# Altium PCB ROUTER.PcbDoc
Units mil, origin at the board's own origin, x right, y up, seen from the top; angles counter-clockwise.
Board outline 6000 x 4000 mil, 2 copper layers (Top Layer, Bottom Layer); 56 components, 30 nets, 161 pads, 6 vias.
Unrouted connection lines stored in the file: 105.
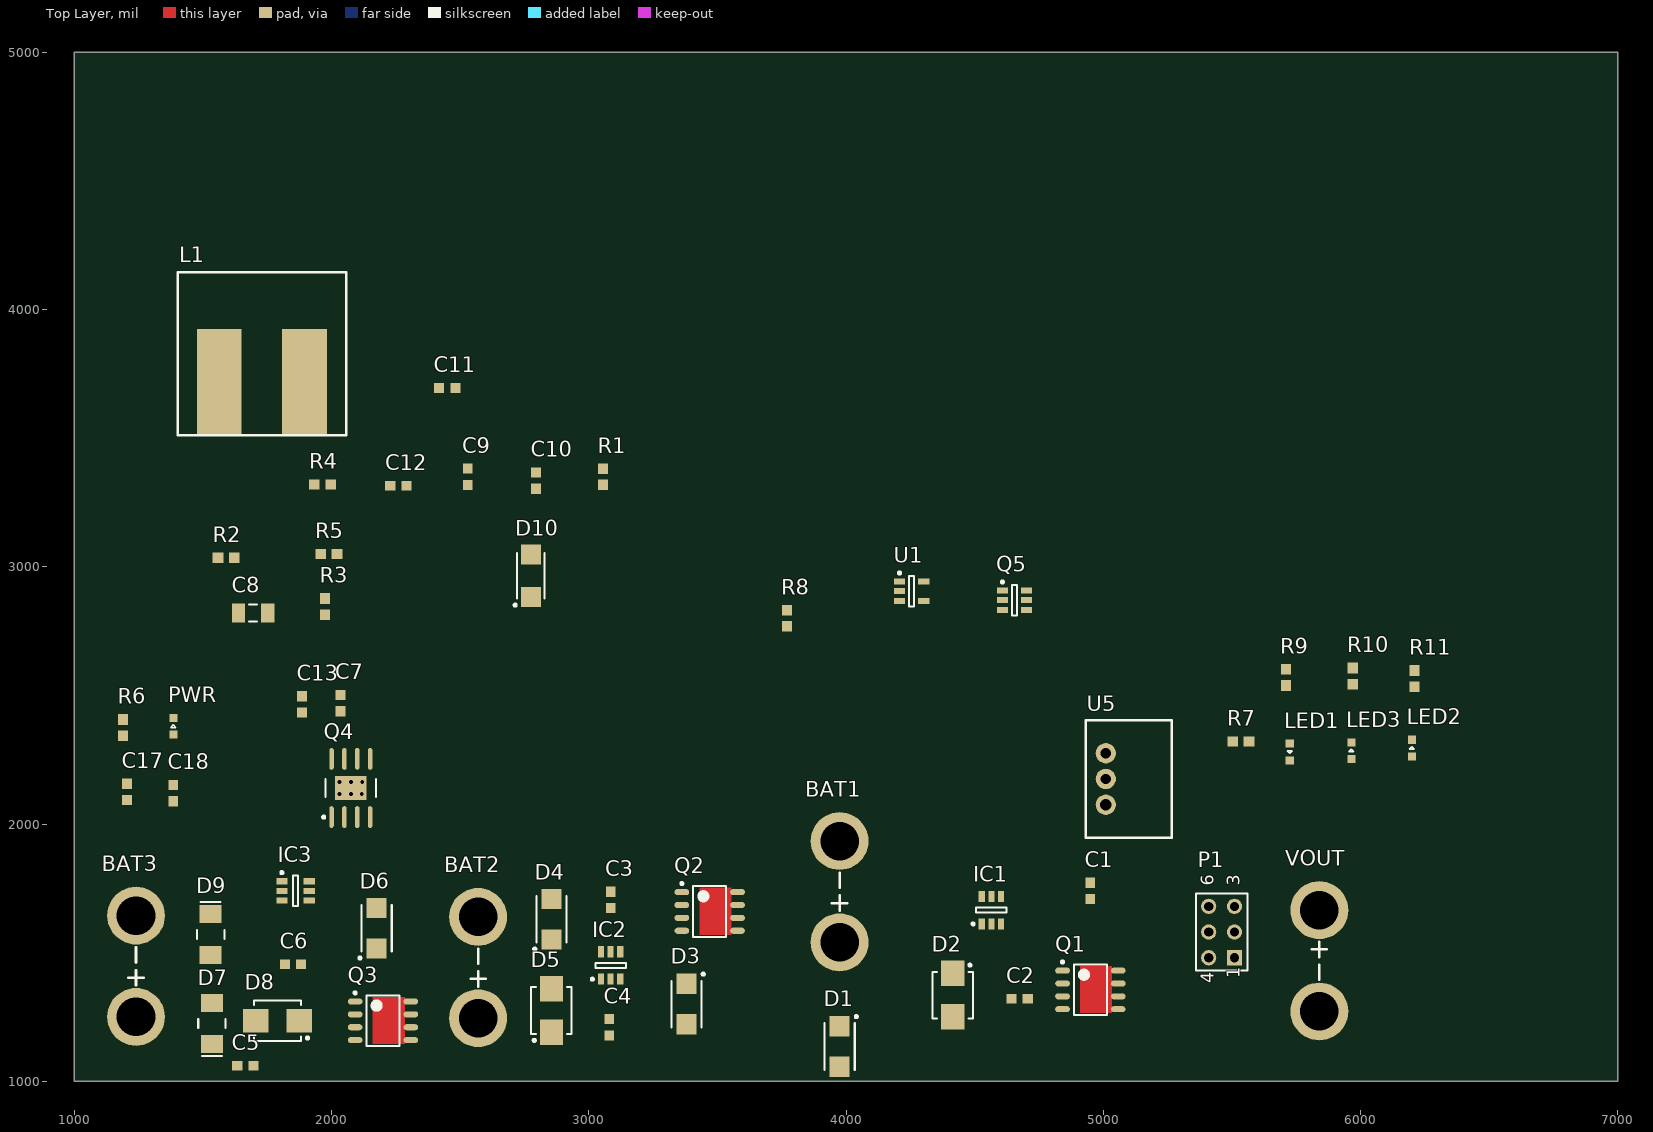
[diagram p0: Top Layer view]
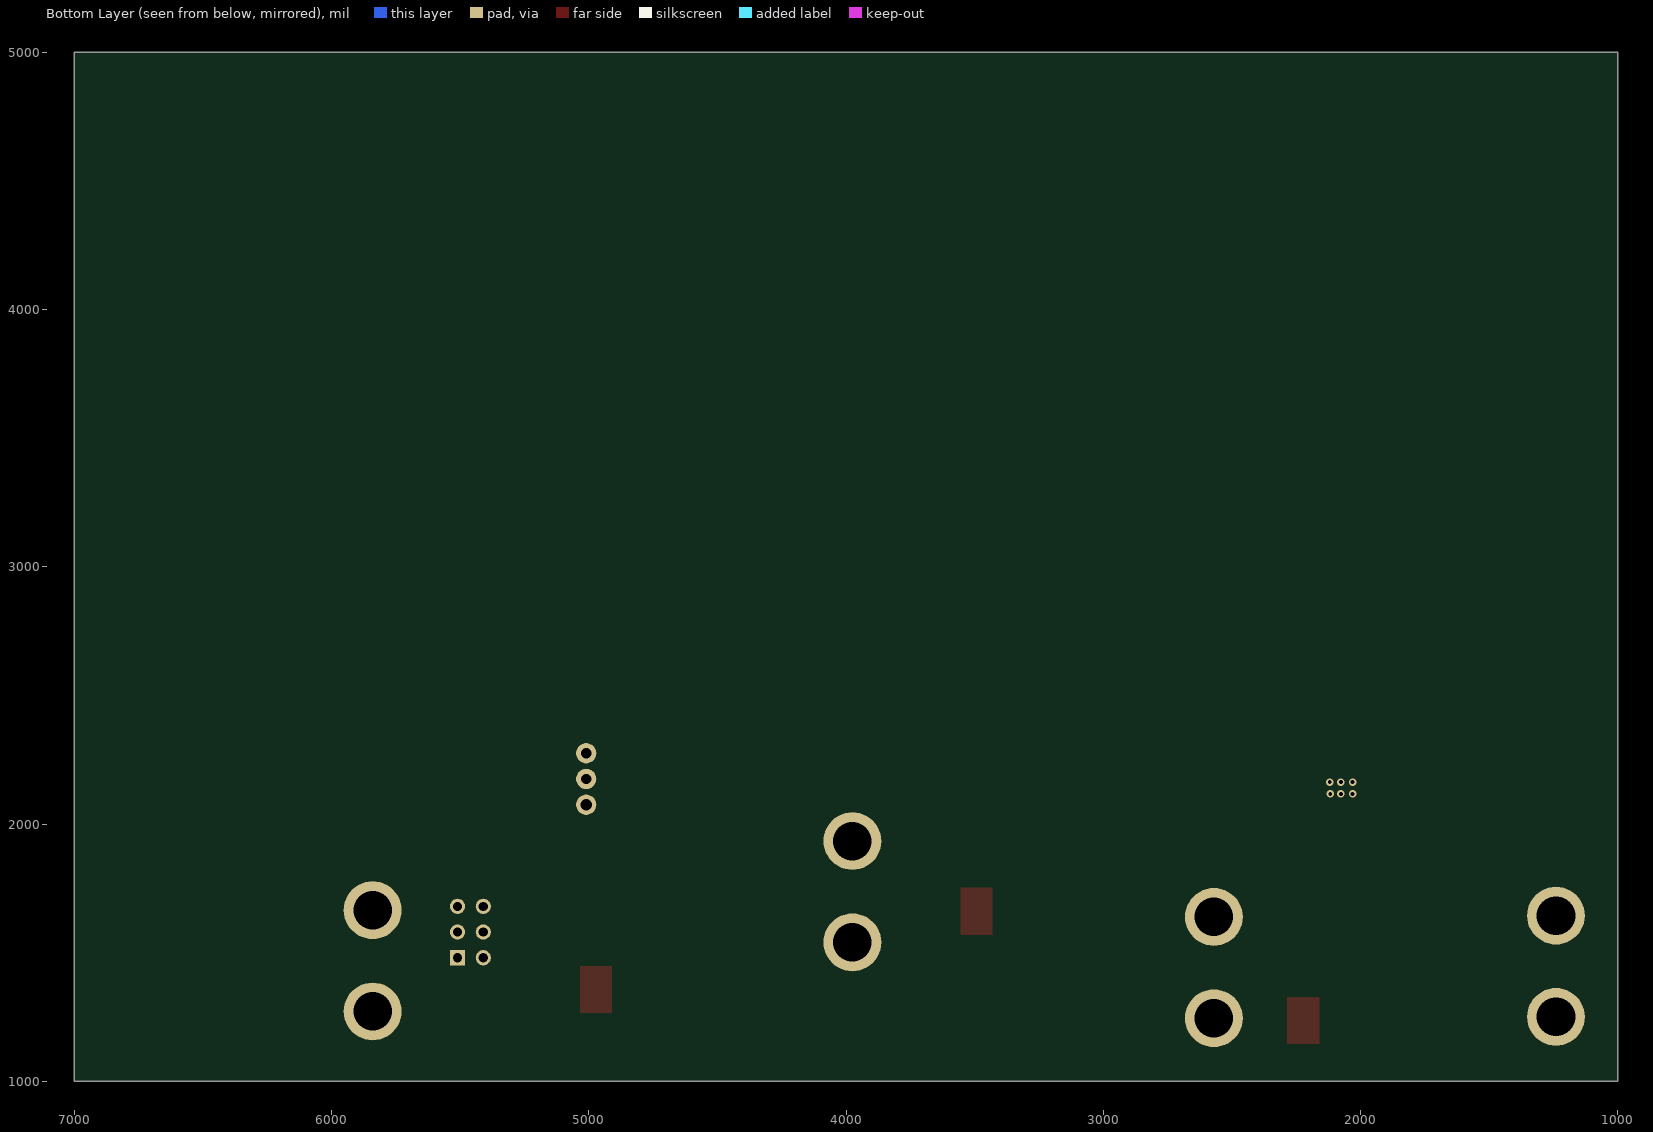
[diagram p1: Bottom Layer view, seen from below]

## Layer stack, top to bottom
Top Layer: signal copper 1.4
Dielectric: dielectric 12.6, FR-4, Dk 4.8
Bottom Layer: signal copper 1.4

## Board outline
1000,1000 7000,1000 7000,5000 1000,5000

## Design rules (kind name [scope] priority, off if disabled: settings)
Clearance [All] p1: gap=10
PolygonConnect [All] p1: connectstyle=Relief reliefconductorwidth=10 reliefentries=4 polygonreliefangle="90 Angle" airgapwidth=10
RoutingVias [All] p1: holewidth=28 width=50 viastyle="Through Hole" minholewidth=28 minwidth=50 maxholewidth=28 maxwidth=50
SolderMaskExpansion [All] p1: expansion=4
Width [All] p1: maxlimit=10 minlimit=10 preferedwidth=10
28 further rules are at their usual default settings.

## Classes and differential pairs
component class Batteries: BAT1 BAT2 BAT3 C1 C2 C3 C4 C5 C6 D1 D2 D3 D4 D5 D6 D7 D8 D9 IC1 IC2 IC3 Q1 Q2 Q3
component class RouterBatteryLED: C17 C18 LED2 LED3 P1 Q5 R8 R9 R10 R11 U1 U5
component class Switching_Regulator: C7 C8 C9 C10 C11 C12 C13 D10 L1 PWR Q4 R1 R2 R3 R4 R5 R6 VOUT

## Components (designator, comment, footprint, x,y, rotation, side; value= is the part's Value field where it differs from the comment)
BAT1 "BATWIRE" BATWIRE12 3975,1540 r90 top
BAT2 "BATWIRE" BATWIRE12 2570,1245 r90 top
BAT3 "BATWIRE" BATWIRE12 1240,1250 r90 top
C1 "Cap" CAPC0603 4950,1740 r90 top
C2 "Cap" CAPC0603 4675,1320 r180 top
C3 "Cap" CAPC0603 3085,1705 r90 top
C4 "Cap" CAPC0603 3080,1210 r90 top
C5 "Cap" CAPC0603 1665,1060 r180 top
C6 "Cap" CAPC0603 1850,1455 r180 top
C7 "Cap" CAPC0603 2035,2470 r270 top
C8 "Cap" CAPC1206 1695,2820 r0 top
C9 "Cap" CAPC0603 2530,3350 r90 top
C10 "Cap" CAPC0603 2795,3335 r90 top
C11 "Cap" CAPC0603 2450,3695 r0 top
C12 "Cap" CAPC0603 2260,3315 r180 top
C13 "Cap" CAPC0603 1885,2465 r90 top
C17 "Cap" CAPC0603 1205,2125 r270 top
C18 "Cap" CAPC0603 1385,2120 r270 top
D1 "SS16T3G" SS16T3G 3975,1135 r270 top
D2 "SMBJ100A-13-F" SMBJ100A-13-F 4415,1335 r270 top
D3 "SS16T3G" SS16T3G 3380,1300 r270 top
D4 "SS16T3G" SS16T3G 2855,1630 r90 top
D5 "SMBJ100A-13-F" SMBJ100A-13-F 2855,1275 r90 top
D6 "SS16T3G" SS16T3G 2175,1595 r90 top
D7 "SS16T3G" SS110-TP 1535,1225 r90 top
D8 "SMBJ100A-13-F" SMBJ100A-13-F 1790,1235 r180 top
D9 "SS16T3G" SS110-TP 1530,1570 r270 top
D10 "DFLS160" RSX501L-20TE25 2775,2965 r90 top
IC1 "LM5050MK-2/NOPB" LM5050MK-2/NOPB 4565,1665 r90 top
IC2 "LM5050MK-2/NOPB" LM5050MK-2/NOPB 3085,1450 r90 top
IC3 "LM5050MK-2/NOPB" LM5050MK-2/NOPB 1860,1740 r0 top
L1 "37392C" 37392C 1895,3720 r90 top
LED1 "LED" LED0603 5725,2280 r270 top
LED2 "LED" LED0603 6200,2295 r90 top
LED3 "LED" LED0603 5965,2285 r90 top
P1 "Header 3X2A" HDR2X3_CEN 5510,1480 r90 top
PWR "LED" LED0603 1385,2380 r90 top
Q1 "TPCA8052-H(TE12LQM" TPCA8052-H(TE12LQM 4950,1355 r0 top
Q2 "TPCA8052-H(TE12LQM" TPCA8052-H(TE12LQM 3470,1660 r0 top
Q3 "TPCA8052-H(TE12LQM" TPCA8052-H(TE12LQM 2200,1235 r0 top
Q4 "TPS54332DDA" TPS54332DDA 2075,2140 r90 top
Q5 "ATTiny5 Atmel Processor" ATTiny5 4655,2870 r0 top
R1 "Res" RES0603 3055,3350 r270 top
R2 "Res" RES0603 1590,3035 r0 top
R3 "Res" RES0603 1975,2845 r90 top
R4 "Res" RES0603 1965,3320 r0 top
R5 "Res" RES0603 1990,3050 r0 top
R6 "Res" RES0603 1190,2375 r270 top
R7 "Res" RES0603 5535,2320 r0 top
R8 "Res" RES0603 3770,2800 r90 top
R9 "Res" RES0603 5710,2570 r90 top
R10 "Res" RES0603 5970,2575 r90 top
R11 "Res" RES0603 6210,2565 r90 top
U1 "IC OPAMP GP 600KHZ TSOT23-5" SOT95P280X100-5N 4255,2905 r0 top
U5 "R-78C5.0-1.0" R-78C5.0-1.0 5010,2275 r270 top
VOUT "BATWIRE" BATWIRE12 5840,1665 r270 top

## Footprints (in the part's own frame and the unit in brackets; to place one, negate y for a bottom-side part, rotate by r counter-clockwise, add the part's x,y. Pads: shape width x height; smd on the part's side, far side on the other; paste and mask are expansions set on the pad)
37392C [mm] "INDUCTOR 3.90UH 10.0A SMD"
  rect 10.4x4.4 smd: 0(0,8.4) 1(0,0)
  silkscreen extent -5.3,-4.1 10.8,12.5, body extent -5.5,-4.3 11,12.6, height 6.8
ATTiny5 [mm] "SOT23, 6-Leads, Body 2.90x2.80mm, Pitch 0.95mm, IPC Medium Density"
  rect 1.1x0.6 smd: 1(-1.2,0.95) 2(-1.2,0) 3(-1.2,-0.95) 4(1.2,-0.95) 5(1.2,0) 6(1.2,0.95)
  silkscreen extent -1.32,-1.5 0.25,1.92, body extent -0.87,-1.5 0.87,1.5, height 1.45
BATWIRE12 [mm] "Two 12AWG wires soldered directly to the board"
  round 5.715 hole 3.81: +(0,0) -(10,0)
  silkscreen extent 3.13,-0.75 6.87,0.75
CAPC0603 [mm] "Chip Capacitor, 2-Leads, Body 1.60x0.80mm, IPC Medium Density"
  rect 1x0.95 smd: 1(-0.8,0) 2(0.8,0)
  body extent -0.88,-0.48 0.87,0.48, height 0.8
CAPC1206 [mm] "Chip Capacitor, 2-Leads, Body 3.20x1.60mm, IPC Medium Density"
  rect 1.3x1.85 smd: 1(-1.45,0) 2(1.45,0)
  silkscreen extent -0.4,-0.82 0.4,0.82, body extent -1.7,-0.9 1.7,0.9, height 1.8
HDR2X3_CEN [mm] "Connector; Header; 3x2 Position"
  rect 1.5x1.5 hole 0.9: 1(0,0)
  round 1.5 hole 0.9: 2(2.54,0) 3(5.08,0) 4(0,2.54) 5(2.54,2.54) 6(5.08,2.54)
  silkscreen extent -1.27,-1.27 6.35,3.81
LED0603 [mm] "Chip LED, 2-Leads, Body 1.60x0.80mm, IPC Medium Density"
  rect 0.8x0.8 smd: A(-0.825,0) C(0.825,0)
  silkscreen extent -0.13,-0.25 0.12,0.25, body extent -0.88,-0.48 0.87,0.47, height 0.8
LM5050MK-2/NOPB [mm] "IC OR CTRLR N+1 6SOT"
  rect 1.1x0.6 smd: 1(-1.35,0.95) 2(-1.35,0) 3(-1.35,-0.95) 4(1.35,-0.95) 5(1.35,0) 6(1.35,0.95)
  silkscreen extent -1.47,-1.5 0.25,1.92, body extent -0.87,-1.52 0.87,1.53, height 1.1
R-78C5.0-1.0 [mm] "CONV DC/DC 1A 5V OUT SIP VERT"
  round 2 hole 1: 1(0,0) 2(2.54,0)
  round 2 hole 1.15: 3(5.08,0)
  silkscreen extent -3.26,-2 8.34,6.5, body extent -3.2,-1.9 8.3,6.5, height 10.8
RES0603 [mm] "Chip Resistor, 2-Leads, Body 1.60x0.80mm, IPC Medium Density"
  rect 1.05x1 smd: 1(-0.8,0) 2(0.8,0)
  body extent -0.88,-0.48 0.87,0.47, height 0.8
RSX501L-20TE25 [mm] "DIODE SCHOTTKY 20V 5A PMDS"
  rect 2x2 smd: A(2.1,0) C(-2.1,0)
  silkscreen extent -3.02,-1.35 2.25,1.67, body extent -2.25,-1.3 2.25,1.3, height 2
SMBJ100A-13-F [mm] "TVS DIODE 100VWM 162VC SMB"
  rect 2.5x2.3 smd: A(2.15,0) C(-2.15,0)
  silkscreen extent -3.07,-2 2.3,2, body extent -2.29,-1.97 2.28,1.97, height 2.62
SOT95P280X100-5N [mm] "SOT23, 5-Leads, Body 2.90x2.80mm, Pitch 0.95mm, IPC Medium Density"
  rect 1.1x0.6 smd: 1(-1.2,0.95) 2(-1.2,0) 3(-1.2,-0.95) 4(1.2,-0.95) 5(1.2,0.95)
  silkscreen extent -1.32,-1.5 0.25,1.92, body extent -0.87,-1.5 0.87,1.5, height 1
SS16T3G [mm] "DIODE SCHOTTKY 60V 1A SMA"
  rect 2x2 smd: A(2,0) C(-2,0)
  silkscreen extent -3.07,-1.5 2.3,1.78, body extent -2.29,-1.46 2.28,1.46, height 2.2
SS110-TP [mil] "DIODE SCHOTTKY 100V 1A SMA"
  rect 70x85 smd: A(80,0) C(-80,0)
  silkscreen extent -127,-53 18,53, body extent -84,-52 84,52, height 116
TPCA8052-H(TE12LQM [mm] "MOSFET N-CH 40V 20A 8SOP"
  oval 1.45x0.6 smd: D(2.75,-1.905) D(2.75,-0.635) D(2.75,0.635) D(2.75,1.905) G(-2.75,-1.905) S(-2.75,-0.635) S(-2.75,0.635) S(-2.75,1.905)
  Top Layer region: -1.025,-2.3 2.15,-2.3 2.15,2.35 -1.025,2.35
  silkscreen extent -2.87,-2.5 1.63,2.88, body extent -2.5,-2.5 2.5,2.5, height 0.95
TPS54332DDA [mm] "IC REG BUCK ADJ 3.5A 8SOPWRPAD"
  oval 2.15x0.45 smd: 1(-2.875,1.905) 2(-2.875,0.635) 3(-2.875,-0.635) 4(-2.875,-1.905) 5(2.875,-1.905) 6(2.875,-0.635) 7(2.875,0.635) 8(2.875,1.905)
  rect 2.4x3.1 smd: 7(0,0)
  silkscreen extent -3,-2.5 0.9,2.8, body extent -2,-2.5 2,2.5, height 1.7

## Part data
BAT1 BAT2 BAT3 VOUT: "Two large gauge leads soldered directly to the board."
D1 D3 D4 D6 D7 D9: "DIODE SCHOTTKY 60V 1A SMA"
D2 D5 D8: "TVS DIODE 100VWM 162VC SMB"
D10: "1.0A Surface Mount Schottky Barrier Rectifier"
IC1 IC2 IC3: "IC OR CTRLR N+1 6SOT"
L1: "INDUCTOR 3.90UH 10.0A SMD"
P1: "Header, 3-Pin, Dual row"
Q1 Q2 Q3: library part TPCA8052-H, "MOSFET N-CH 40V 20A 8SOP"
Q4: "IC REG BUCK ADJ 3.5A 8SOPWRPAD"
U5: "CONV DC/DC 1A 5V OUT SIP VERT"

## Via types
v1: diameter 29, hole 15, Top Layer to Bottom Layer, tented both sides, 6 vias

## Nets (pads, with @x,y where several pads share a name; then routed paths per layer and width w, separated by ;. In a path a pad name is that pad's centre, name@x,y a point inside that pad or via, vN(x,y) a via of type N, cw(c..) or ccw(c..) an arc to the next point about the centre after c; other vN are vias at no path point)
5V: C18.1 P1.5 U5.3
12V: C8.1 C17.1 L1.0 PWR.A R2.2 U5.1 VOUT.+
BATT1: BAT1.+ C1.1 D1.C IC1.4 Q1.S
BATT2: BAT2.+ C3.1 D4.C IC2.4 Q2.S
BATT3: BAT3.+ C5.1 D7.C IC3.4 Q3.S
GND: BAT1.- BAT2.- BAT3.- C1.2 C3.2 C5.2 C8.2 C9.2 C10.2 C11.2 C13.2 C17.2 C18.2 D3.C D6.C D9.C D10.A LED1.C LED2.C LED3.C Q4.7 R3.2 R4.2 R5.1 R6.2 R8.2 U5.2 VOUT.-
  other v1: 2030.71,2117 2075.98,2117 2117.32,2117 2030.71,2163 2075.98,2163 2119.29,2163
NetC2_2: C2.2 D1.A D2.A D3.A IC1.2 IC1.3
NetC4_2: C4.2 D4.A D5.A D6.A IC2.2 IC2.3
NetC6_2: C6.2 D7.A D8.A D9.A IC3.2 IC3.3
NetC7_1: C7.1 D10.C L1.1 Q4.8
NetC7_2: C7.2 Q4.1
NetC11_1: C11.1 C12.1 Q4.6
NetC12_2: C12.2 R4.1
NetC13_1: C13.1 Q4.4
NetIC1_5: IC1.5 Q1.G
NetIC2_5: IC2.5 Q2.G
NetIC3_5: IC3.5 Q3.G
NetLED1_A: LED1.A R7.2 R9.2
NetLED2_A: LED2.A R10.2
NetLED3_A: LED3.A R11.2
NetPWR_C: PWR.C R6.1
NetQ4_3: Q4.3 R1.2 R3.1
NetQ4_5: Q4.5 R2.1 R5.2
NetR7_1: R7.1 R8.1
PB2: P1.6
PB3/RESET: P1.4
RAIL+: C2.1 C4.1 C6.1 C9.1 C10.1 D2.C D5.C D8.C IC1.6 IC2.6 IC3.6 Q1.D Q2.D Q3.D Q4.2 R1.1
RESET: P1.3
TPICLK/PB1: P1.2
TPIDATA/PB0: P1.1
pads on no net: IC1.1 IC2.1 IC3.1 Q5.1 Q5.2 Q5.3 Q5.4 Q5.5 Q5.6 R9.1 R10.1 R11.1 U1.1 U1.2 U1.3 U1.4 U1.5

## Text inside footprints (layer, text, board x,y; h text height)
P1: Top Overlay "6" at 5430,1760 h50 r90; Top Overlay "3" at 5530,1760 h50 r90; Top Overlay "1" at 5530,1400 h50 r90; Top Overlay "4" at 5430,1380 h50 r90